# Altium PCB AQCA-Light-Control-A0.PcbDoc (part 1 of 2)
Units mm, origin at the board's own origin, x right, y up, seen from the top; angles counter-clockwise.
Board outline 100 x 100 mm, 2 copper layers (Top Layer, Bottom Layer); 147 components, 99 nets, 439 pads, 162 vias.
Unrouted connection lines stored in the file: 13.
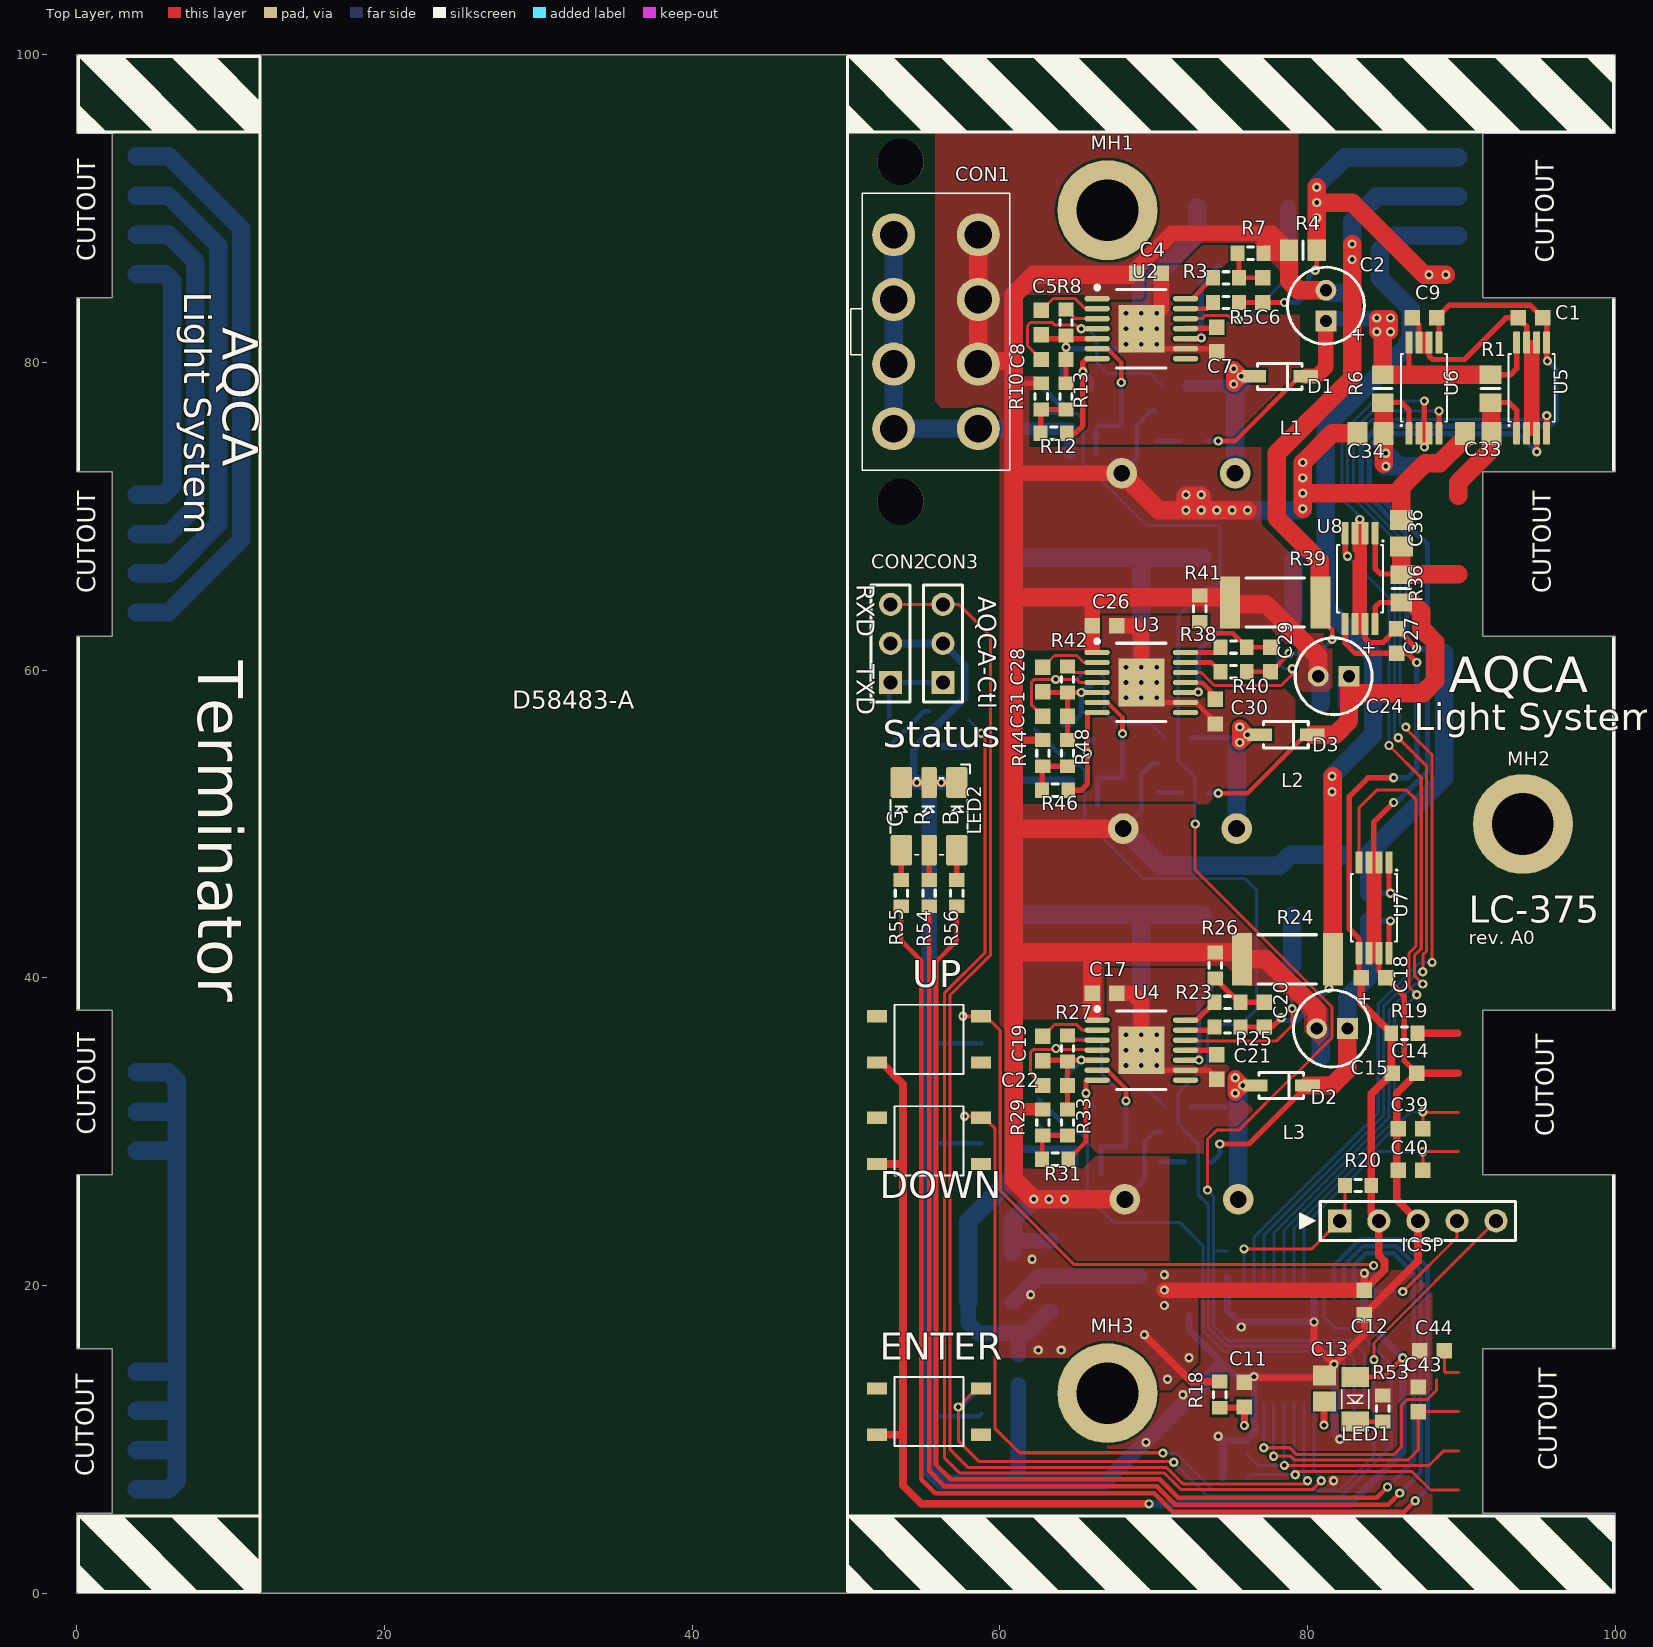
[diagram p0: Top Layer view]
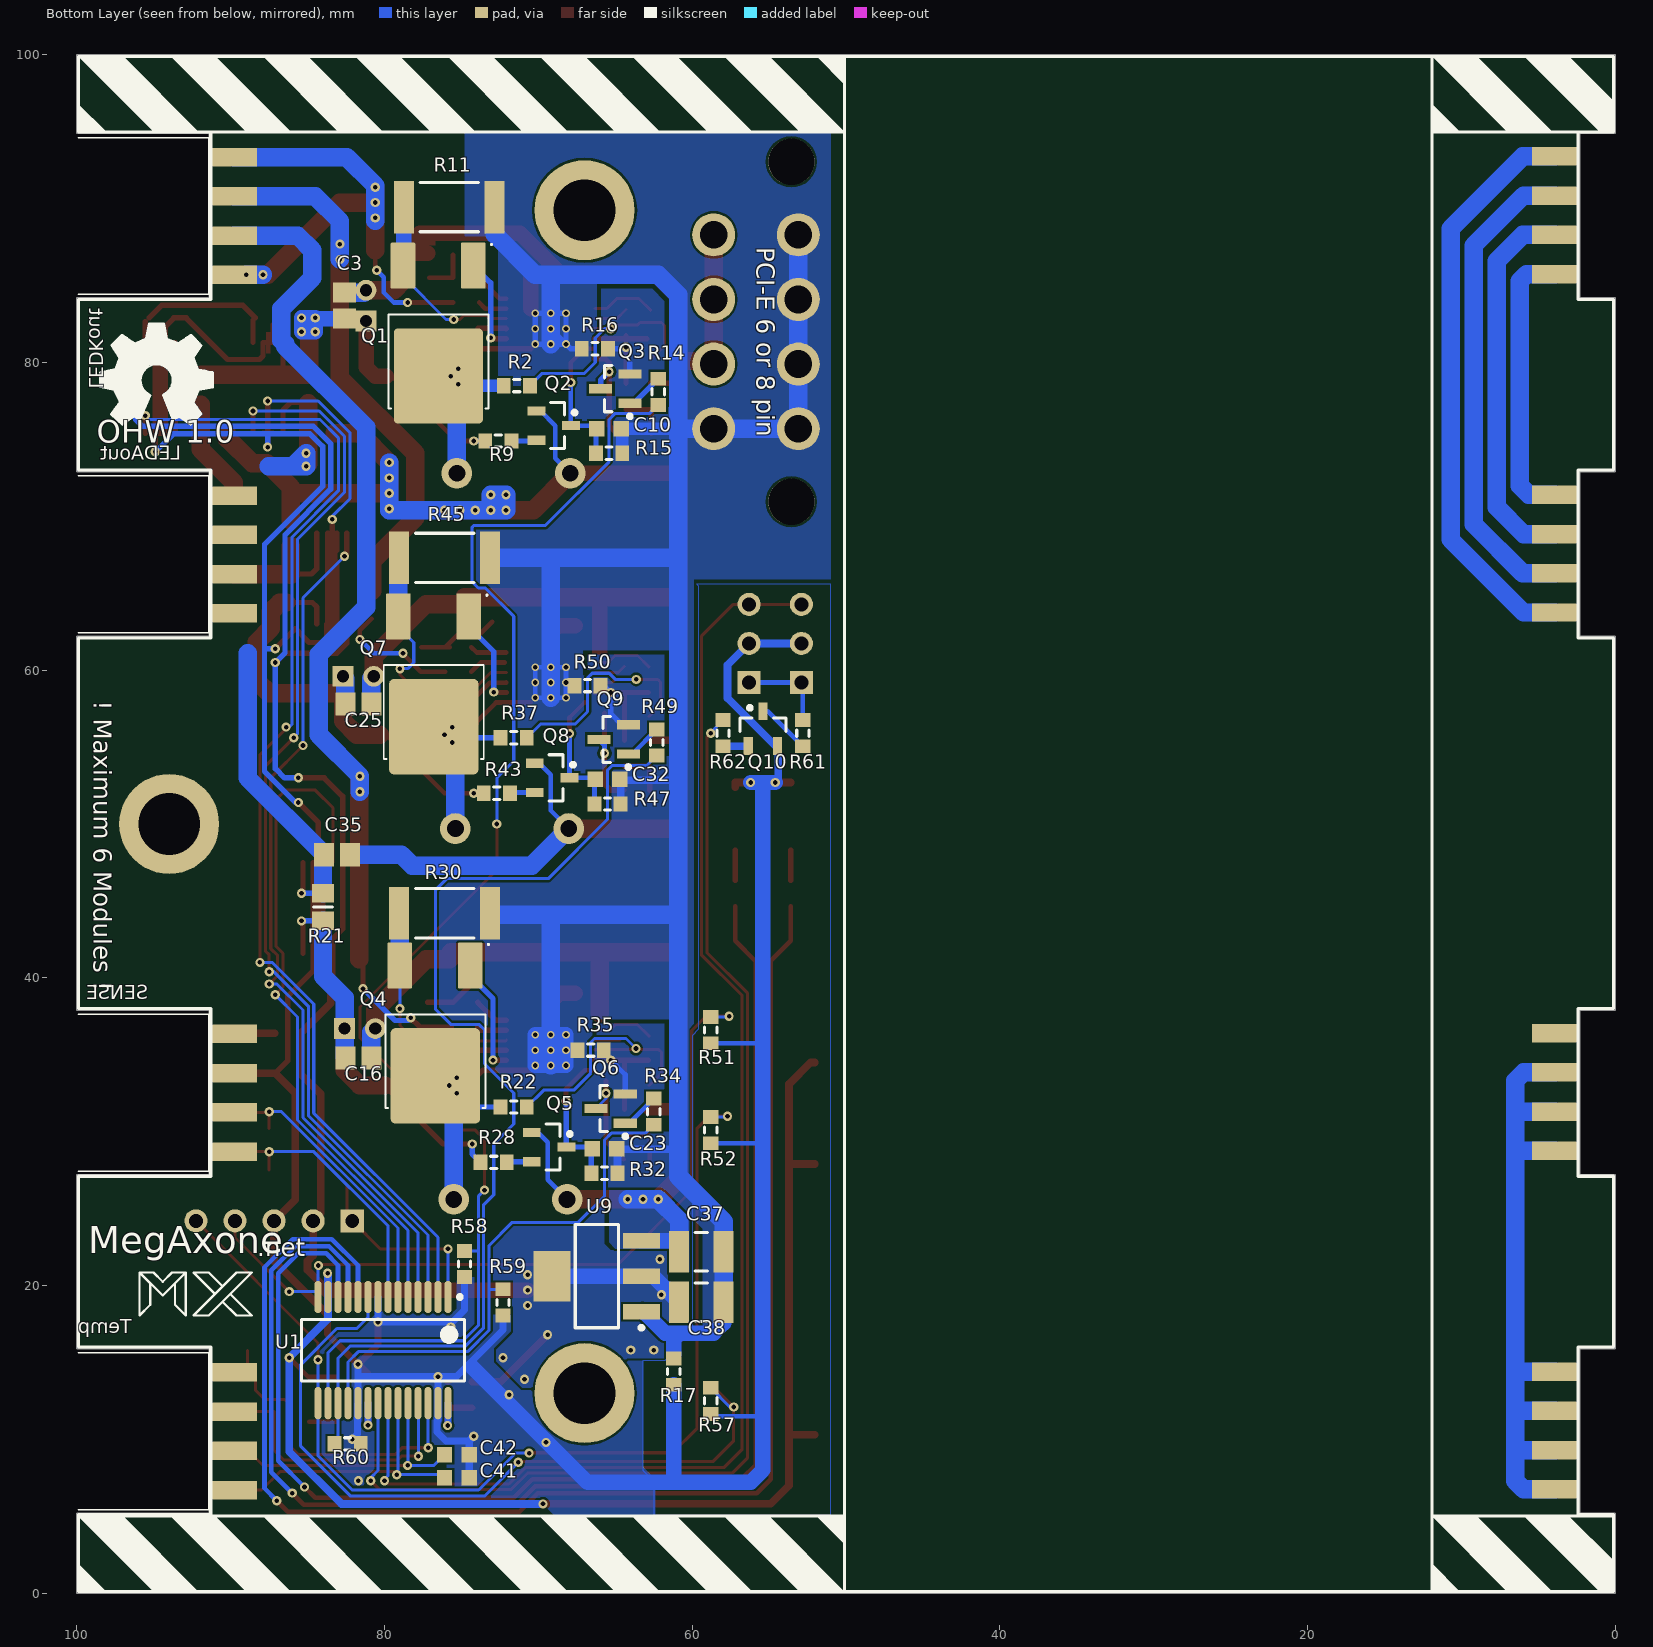
[diagram p1: Bottom Layer view, seen from below]

## Layer stack, top to bottom
Top Layer: signal copper 0.0356
Dielectric: dielectric 0.32, FR-4, Dk 4.8
Bottom Layer: signal copper 0.0356

## Board outline
100,100 100,94.9 91.4,94.9 91.4,84.2 100,84.2 100,72.9 91.4,72.9 91.4,62.2 100,62.2 100,37.9 91.4,37.9 91.4,27.2 100,27.2 100,15.9 91.4,15.9 91.4,5.2 100,5.2 100,0 0,0 0,5.2 2.3,5.2 2.3,15.9 0,15.9 0,27.2 2.3,27.2 2.3,37.9 0,37.9 0,62.2 2.3,62.2 2.3,72.9 0,72.9 0,84.2 2.3,84.2 2.3,94.9 0,94.9 0,100

## Design rules (kind name [scope] priority, off if disabled: settings)
Clearance HV [(InNet('NetC6_2') OR InNet('NetC29_2') OR InNet('NetC20_2') OR InNet('NetC33_2') OR InNet('NetC35_1') OR InNet('NetC36_1') OR InNet('NetC34_1'))] p1: gap=0.2
Clearance [All] p2: gap=0.152
HoleSize [All] p1: absolutevalues=TRUE maxlimit=6.3 minlimit=0.3 maxpercent=80.000 minpercent=20.000
HoleToHoleClearance [All] p1: gap=0.1 allowstackedmicrovias=TRUE
MinimumSolderMaskSliver [All] p1: minsoldermaskwidth=0.1
PlaneClearance [All] p1: clearance=0.5
PlaneConnect [All] p1: planeconnectstyle=Direct reliefexpansion=0.508 reliefentries=4 reliefconductorwidth=0.254 reliefairgap=0.254
PolygonConnect [All] p1: connectstyle=Direct reliefconductorwidth=0.254 reliefentries=4 polygonreliefangle="90 Angle"
RoutingVias [All] p1: holewidth=0.3 width=0.6 viastyle="Through Hole" minholewidth=0.3 minwidth=0.6 maxholewidth=6.3 maxwidth=6.5
SilkToSilkClearance [All] p1: silktosilkclearance=0.1
SilkscreenOverComponentPads [All] p1: minsilkscreentomaskgap=0.254
SolderMaskExpansion [All] p1: expansion=0.05
Width [All] p1: maxlimit=12.7 minlimit=0.152 preferedwidth=0.152
21 further rules are at their usual default settings.

## Classes and differential pairs
component class AQCA-Light-Control-WarmWhite-A0: C24 C25 C26 C27 C28 C29 C30 C31 C32 C36 D3 L2 Q7 Q8 Q9 R36 R37 R38 R39 R40 R41 R42 R43 R44 R45 R46 R47 R48 R49 R50 R60 U3 U8
component class AQCA-Light-Control-uC-A0: C11 C12 C13 C14 C37 C38 C39 C40 C41 C42 C43 C44 CON1 CON2 CON3 DOWN ENTER ICSP LED1 LED2 LEDAout LEDKout MH1 MH2 MH3 Q10 R17 R18 R19 R20 R51 R52 R53 R54 R55 R56 R57 R61 R62 SENSE Temp U1 U9 UP
component class AQCA-Light-Control-Blue-A0: C15 C16 C17 C18 C19 C20 C21 C22 C23 C35 D2 L3 Q4 Q5 Q6 R21 R22 R23 R24 R25 R26 R27 R28 R29 R30 R31 R32 R33 R34 R35 R59 U4 U7
component class AQCA-Light-Control-CoolWhite-A0: C1 C2 C3 C4 C5 C6 C7 C8 C9 C10 C33 C34 D1 L1 Q1 Q2 Q3 R1 R2 R3 R4 R5 R6 R7 R8 R9 R10 R11 R12 R13 R14 R15 R16 R58 U1 U5 U6

## Components (designator, comment, footprint, x,y, rotation, side; value= is the part's Value field where it differs from the comment)
C1 "100nF" CAPC1608N 94.5,82.9 r180 top
C2 "4.7µF" CAPPR2-5x11 81.2,83.7 r90 top
C3 "100nF" CAPC2012N 82.6,83.7 r90 bottom
C4 "1µF" CAPC1608N 69.7,85.8 r180 top
C5 "220nF" CAPC1608N 62.7,82.6 r90 top
C6 "100nF" CAPC1608N 77.1,84.7 r270 top
C7 "3.3µF" CAPC1608N 74.1,81.5 r90 top
C8 "1nF" CAPC1608N 63.5,80.2 r180 top
C9 "100nF" CAPC1608N 87.6,82.9 r180 top
C10 "47pF" CAPC1608N 65.4,75.7 r0 bottom
C11 "100nF" CAPC1608N 75.9,12.9 r90 top
C12 "100nF" CAPC1608N 83.7,18.9 r270 top
C13 "10µF" CAPC2012N 81.1,13.3 r90 top
C14 "100nF" CAPC1608N 86.3,33.8 r180 top
C15 "4.7µF" CAPPR2-5x11 81.6,36.7 r180 top
C16 "100nF" CAPC2012N 81.7,34.8 r180 bottom
C17 "1µF" CAPC1608N 66.8,39 r180 top
C18 "100nF" CAPC1608N 84.3,40 r0 top
C19 "220nF" CAPC1608N 62.8,35.4 r90 top
C20 "100nF" CAPC1608N 77.2,37.6 r270 top
C21 "3.3µF" CAPC1608N 74.1,34.2 r90 top
C22 "1nF" CAPC1608N 63.6,33 r180 top
C23 "47pF" CAPC1608N 65.7,28.9 r0 bottom
C24 "4.7µF" CAPPR2-5x11 81.7,59.6 r180 top
C25 "100nF" CAPC2012N 81.7,57.8 r180 bottom
C26 "1µF" CAPC1608N 66.8,62.9 r180 top
C27 "100nF" CAPC1608N 85.8,61.9 r90 top
C28 "220nF" CAPC1608N 62.8,59.4 r90 top
C29 "100nF" CAPC1608N 77.6,60.7 r270 top
C30 "3.3µF" CAPC1608N 74,57.3 r90 top
C31 "1nF" CAPC1608N 63.6,57 r180 top
C32 "47pF" CAPC1608N 65.5,52.9 r0 bottom
C33 "100nF" CAPC2012N 91.1,75.4 r0 top
C34 "100nF" CAPC2012N 84.1,75.4 r180 top
C35 "100nF" CAPC2012N 83.1,48 r180 bottom
C36 "100nF" CAPC2012N 86.1,68.9 r90 top
C37 "10µF" CAPC3225N 59.4,22.2 r0 bottom
C38 "10µF" CAPC3225N 59.4,18.9 r0 bottom
C39 "100nF" CAPC1608N 86.7,30.2 r180 top
C40 "100nF" CAPC1608N 86.7,27.5 r180 top
C41 "100nF" CAPC1608N 75.3,7.5 r180 bottom
C42 "100nF" CAPC1608N 75.3,9 r180 bottom
C43 "100nF" CAPC1608N 87.2,12.6 r90 top
C44 "100nF" CAPC1608N 88.1,15.761 r180 top
CON1 "Molex Mini-Fit 8pin" "Molex Mini-Fit 8pin" 58.6,88.3 r90 top
CON2 "Header 3" HDR1X3 52.9,59.2 r90 top
CON3 "Header 3" HDR1X3 56.3,59.2 r90 top
D1 "PMEG6020ER" SOD123 78.2,79.1 r0 top
D2 "PMEG6020ER" SOD123 78.3,33 r0 top
D3 "PMEG6020ER" SOD123 78.6,55.8 r0 top
DOWN "Tact Button NO" "TACT SMD 4.5×4.5mm" 51.9,30.9 r0 top
ENTER "Tact Button NO" "TACT SMD 4.5×4.5mm" 51.9,13.3 r0 top
ICSP "Header 5" HDR1X5 82.1,24.2 r0 top
L1 "33µH" "Inductor AIUR5-6" 71.6,72.8 r0 top
L2 "33µH" "Inductor AIUR5-6" 71.7,49.7 r0 top
L3 "33µH" "Inductor AIUR5-6" 71.8,25.6 r0 top
LED1 "" "LED 3216m" 83.1,12.6 r270 top
LED2 "LED RGB" "LED PLCC-6" 55.4,50.5 r0 top
LEDAout "HDR4x1" "HDR4x1 EDGE female" 89.8,63.7 r0 bottom
LEDKout "HDR4x1" "HDR4x1 EDGE female" 89.8,85.7 r0 bottom
MH1 "Mounting Hole" "Mount Hole 4-6.5" 67,89.9 r0 top
MH2 "Mounting Hole" "Mount Hole 4-6.5" 94,50 r0 top
MH3 "Mounting Hole" "Mount Hole 4-6.5" 67,13 r0 top
Q1 "NTD5867NL" "DPAK 369AA" 78.8,86.3 r90 bottom
Q2 "S8550" SOT23_N 69,75.9 r180 bottom
Q3 "2N7002" SOT23-3N 65,78.3 r0 bottom
Q4 "NTD5867NL" "DPAK 369AA" 79,40.8 r90 bottom
Q5 "S8550" SOT23_N 69.3,29 r180 bottom
Q6 "2N7002" SOT23-3N 65.3,31.5 r0 bottom
Q7 "NTD5867NL" "DPAK 369AA" 79.1,63.5 r90 bottom
Q8 "S8550" SOT23_N 69.1,53 r180 bottom
Q9 "2N7002" SOT23-3N 65.1,55.5 r0 bottom
Q10 "S8050" SOT23_N 55.4,56.2 r90 bottom
R1 "0.1" RESC2012N 91.9,78.3 r90 top
R2 "27K" RESC1608N 71.4,78.5 r0 bottom
R3 "1K" RESC1608N 74.7,85.5 r180 top
R4 "0.1" RESC2012N 79.7,87.3 r0 top
R5 "1K" RESC1608N 74.7,83.9 r0 top
R6 "0.1" RESC2012N 84.9,78.3 r90 top
R7 "10" RESC1608N 76.3,87.1 r0 top
R8 "12.4K" RESC1608N 64.3,82.6 r270 top
R9 "470K" RESC1608N 72.6,74.9 r0 bottom
R10 "10K" RESC1608N 62.7,77.8 r90 top
R11 "0.1" RESC6332N 75.8,90.1 r0 bottom
R12 "27K" RESC1608N 63.5,75.4 r180 top
R13 "1.5K" RESC1608N 64.3,77.8 r270 top
R14 "10K" RESC1608N 62.2,78.1 r270 bottom
R15 "12.4K" RESC1608N 65.4,74.1 r0 bottom
R16 "0" RESC1608N 66.325,80.9 r0 bottom
R17 "0" RESC1608N 61.2,14.4 r90 bottom
R18 "10" RESC1608N 74.3,12.9 r90 top
R19 "0" RESC1608N 86.3,36.4 r0 top
R20 "10K" RESC1608N 83.3,26.5 r0 top
R21 "0.1" RESC2012N 84,44.6 r270 bottom
R22 "27K" RESC1608N 71.6,31.6 r0 bottom
R23 "1K" RESC1608N 74.8,38.4 r180 top
R24 "0.2" RESC6332N 78.7,41.2 r0 top
R25 "1K" RESC1608N 74.8,36.8 r0 top
R26 "10" RESC1608N 74,40.8 r90 top
R27 "12.4K" RESC1608N 64.4,35.4 r270 top
R28 "470K" RESC1608N 72.9,28 r0 bottom
R29 "10K" RESC1608N 62.8,30.6 r90 top
R30 "0.1" RESC6332N 76.1,44.2 r0 bottom
R31 "27K" RESC1608N 63.6,28.2 r180 top
R32 "12.4K" RESC1608N 65.7,27.3 r0 bottom
R33 "1.5K" RESC1608N 64.4,30.6 r270 top
R34 "10K" RESC1608N 62.5,31.3 r270 bottom
R35 "0" RESC1608N 66.6,35.3 r0 bottom
R36 "0.1" RESC2012N 86.1,65.3 r270 top
R37 "27K" RESC1608N 71.6,55.6 r0 bottom
R38 "1K" RESC1608N 75.2,61.5 r180 top
R39 "0.2" RESC6332N 77.9,64.4 r0 top
R40 "1K" RESC1608N 75.2,59.9 r0 top
R41 "10" RESC1608N 73,64 r90 top
R42 "12.4K" RESC1608N 64.4,59.4 r270 top
R43 "470K" RESC1608N 72.7,52 r0 bottom
R44 "10K" RESC1608N 62.8,54.6 r90 top
R45 "0.1" RESC6332N 76.1,67.3 r0 bottom
R46 "27K" RESC1608N 63.6,52.2 r180 top
R47 "12.4K" RESC1608N 65.5,51.3 r0 bottom
R48 "1.5K" RESC1608N 64.4,54.6 r270 top
R49 "10K" RESC1608N 62.3,55.3 r270 bottom
R50 "0" RESC1608N 66.8,59 r0 bottom
R51 "10K" RESC1608N 58.8,36.6 r90 bottom
R52 "10K" RESC1608N 58.8,30.1 r90 bottom
R53 "470" RESC1608N 84.9,12 r270 top
R54 "470" RESC1608N 55.4,45.5 r90 top
R55 "330" RESC1608N 53.6,45.5 r90 top
R56 "330" RESC1608N 57.2,45.5 r90 top
R57 "10K" RESC1608N 58.8,12.5 r90 bottom
R58 "10K" RESC1608N 74.8,21.4 r270 bottom
R59 "10K" RESC1608N 72.3,18.9 r270 bottom
R60 "10K" RESC1608N 82.4,9.7 r180 bottom
R61 "1K" RESC1608N 52.8,55.9 r90 bottom
R62 "10K" RESC1608N 58,55.9 r270 bottom
SENSE "HDR4x1" "HDR4x1 EDGE female" 89.8,28.7 r0 bottom
Temp "HDR4x1" "HDR4x1 EDGE female" 89.8,6.7 r0 bottom
U1 "PIC32MX150F128B" SSOP28_N 80.1,15.8 r270 bottom
U2 "LM3429" TSOP65P640_HS-14N 69.2,82.2 r0 top
U3 "LM3429" TSOP65P640_HS-14N 69.2,59.2 r0 top
U4 "LM3429" TSOP65P640_HS-14N 69.2,35.3 r0 top
U5 "TCS103" TSSOP8N_N 93.6,75.4 r0 top
U6 "TCS103" TSSOP8N_N 86.6,75.4 r0 top
U7 "TCS103" TSSOP8N_N 85.3,47.5 r180 top
U8 "TCS103" TSSOP8N_N 84.4,68.9 r180 top
U9 "NCP117LP-??" SOT223-4N 66.2,20.6 r0 bottom
UP "Tact Button NO" "TACT SMD 4.5×4.5mm" 51.9,37.5 r0 top

## Footprints (in the part's own frame and the unit in brackets; to place one, negate y for a bottom-side part, rotate by r counter-clockwise, add the part's x,y. Pads: shape width x height; smd on the part's side, far side on the other; paste and mask are expansions set on the pad)
CAPC1608N [mm] "Chip Capacitor, Body 1.6x0.8mm, IPC Medium Density"
  rect 1x1 smd: 1(-0.8,0) 2(0.8,0)
  body extent -0.87,-0.48 0.87,0.48, height 0.85
CAPC2012N [mm] "Chip Capacitor, Body 2.0x1.3mm, IPC Medium Density"
  rect 1.3x1.5 smd: 1(-0.85,0) 2(0.85,0)
  body extent -1.1,-0.72 1.1,0.72, height 1.1
CAPC3225N [mm] "Chip Capacitor, Body 3.2x2.5mm, IPC Medium Density"
  rect 1.3x2.7 smd: 1(-1.45,0) 2(1.45,0)
  silkscreen extent -0.4,-1.25 0.4,1.25, body extent -1.7,-1.35 1.7,1.35, height 1.35
CAPPR2-5x11 [mm] "Capacitor, Electrolytic, Radial; Body 5 x 11 mm (Dia.xH typ); Pin Spacing 2 mm (typ)"
  rect 1.35x1.35 hole 0.8: 1(-1,0)
  round 1.35 hole 0.8: 2(1,0)
  silkscreen extent -2.5,-2.5 2.5,2.5
"DPAK 369AA" [mm] "DPAK 369 SMD 6x6.5mm"
  rrect10% 3x1.6 smd: 1(0,-4.575) 3(0,0)
  rrect10% 6.2x5.8 smd: 4(-7.175,-2.3)
  silkscreen extent -9.28,-5.77 1.4,0.95, body extent -9.28,-5.55 -3.17,0.95, height 2.25
HDR1X3 [mm] "Connector; Header; 3 Position"
  rect 1.5x1.5 hole 0.9: 1(0,0)
  round 1.5 hole 0.9: 2(2.54,0) 3(5.08,0)
  silkscreen extent -1.27,-1.27 6.35,1.27
HDR1X5 [mm] "Connector; Header; 5 Position"
  rect 1.5x1.5 hole 0.9: 1(0,0)
  round 1.5 hole 0.9: 2(2.54,0) 3(5.08,0) 4(7.62,0) 5(10.16,0)
  silkscreen extent -1.27,-1.27 11.43,1.27
"HDR4x1 EDGE female" [mm] "Header mounted on the edge as a SMD part"
  rect 3x1.2 smd: 1(0,-7.65) 2(0,-5.1) 3(0,-2.55) 4(0,0)
  silkscreen extent 1.63,-8.93 10.12,1.28, body extent 1.63,-8.93 10.12,1.28, height 2.5
"Inductor AIUR5-6" [mm] "Abracon AIUR5-6 Inductor family 12.7mm dia"
  round 2 hole 1.1: 1(-3.675,0) 2(3.7,0)
  body extent -6.3,-6.34 6.35,6.34, height 18
"LED 3216m" [mm] "LED 3.2×1.6mm"
  rect 1.3x1.8 smd: A(-1.45,0) K(1.45,0)
  silkscreen extent -0.63,-0.87 0.63,0.87, body extent -1.6,-0.8 1.6,0.8, height 1
"LED PLCC-6" [mm] "LED SMD PLCC-6 5×5mm body 6pin"
  rrect20% 1.4x2 smd: 1(-1.8,2.2) 2(-1.8,-2.2) 5(1.8,2.2) 6(1.8,-2.2)
  rrect20% 1x2 smd: 3(0,2.2) 4(0,-2.2)
  silkscreen extent -2.5,-2.5 2.68,3.37, body extent -2.5,-2.5 2.5,2.5, height 1.5
"Molex Mini-Fit 8pin" [mm] "Molex ATX PCI-E Connector"
  round 2.8 hole 1.8: 1(0,0) 2(-4.2,0) 3(-8.4,0) 4(-12.6,0) 5(0,5.5) 6(-4.2,5.5) 7(-8.4,5.5) 8(-12.6,5.5)
  round 3 hole 3 unplated: ""(-17.35,5.05) ""(4.75,5.05)
  silkscreen extent -15.3,-2.05 2.7,8.3, body extent -15.3,-2.05 2.7,8.3, height 12.8
"Mount Hole 4-6.5" [mm] "Mounting Hole 4mm hole 6.5mm ring"
  round 6.5 hole 4: 1(0,0)
RESC1608N [mm] "Chip Resistor, Body 1.6x0.8mm, IPC Medium Density"
  rect 0.9x1 smd: 1(-0.85,0) 2(0.85,0)
  silkscreen extent -0.2,-0.4 0.2,0.4, body extent -0.85,-0.48 0.85,0.48, height 0.6
RESC2012N [mm] "Chip Resistor, Body 2.0x1.3mm, IPC Medium Density"
  rect 1.2x1.4 smd: 1(-0.9,0) 2(0.9,0)
  silkscreen extent 0,-0.6 0,0.6, body extent -1.07,-0.7 1.07,0.7, height 0.65
RESC6332N [mm] "Chip Resistor, Body 6.3x3.2mm, IPC Medium Density"
  rect 1.3x3.4 smd: 1(-2.95,0) 2(2.95,0)
  silkscreen extent -1.9,-1.6 1.9,1.6, body extent -3.22,-1.68 3.22,1.68, height 0.71
SOD123 [mm] "SOD-123; 2 Leads; Body 2.7 x 1.6 mm, (LxW)"
  rect 1.6x0.8 smd: 1(-1.7,0) 2(1.7,0)
  silkscreen extent -1.45,-0.85 1.45,0.85
SOT23-3N [mm] "SOT23, 3-Leads, Body 2.9x1.3mm, Pitch 0.95mm, Lead Span 2.5mm, IPC Medium Density"
  rect 1.5x0.6 smd: 1(-0.95,0.95) 2(-0.95,-0.95) 3(0.95,0)
  silkscreen extent -1.07,-1.5 0.7,1.92, body extent -0.7,-1.5 0.7,1.5, height 1.1
SOT23_N [mm] "SOT23, 3-Leads, Body 2.9x1.3mm, Pitch 0.95mm, Lead Span 2.3mm - Reverse Pinning, IPC Medium Density"
  rect 1.15x0.6 smd: 1(1.125,0) 2(-1.125,-0.95) 3(-1.125,0.95)
  silkscreen extent -0.2,-1.5 1.47,1.5, body extent -0.7,-1.5 0.7,1.5, height 1.1
SOT223-4N [mm] "SOT223, 4-Leads, Body 6.5x3.5mm, Pitch 2.3mm, Lead Span 7mm, IPC Medium Density"
  rect 2.4x1 smd: 1(-2.9,2.3) 2(-2.9,0) 3(-2.9,-2.3)
  rect 2.4x3.3 smd: 4(2.9,0)
  silkscreen extent -3.02,-3.35 1.4,3.47, body extent -1.85,-3.35 1.85,3.35, height 1.8
SSOP28_N [mm] "SOP, 28-Leads, Body 10.2x5.3mm, Pitch 0.65mm, IPC Medium Density"
  oval 2.1x0.45 smd: 1(-3.45,4.225) 2(-3.45,3.575) 3(-3.45,2.925) 4(-3.45,2.275) 5(-3.45,1.625) 6(-3.45,0.975) 7(-3.45,0.325) 8(-3.45,-0.325) 9(-3.45,-0.975) 10(-3.45,-1.625) 11(-3.45,-2.275) 12(-3.45,-2.925) 13(-3.45,-3.575) 14(-3.45,-4.225) 15(3.45,-4.225) 16(3.45,-3.575) 17(3.45,-2.925) 18(3.45,-2.275) 19(3.45,-1.625) 20(3.45,-0.975) 21(3.45,-0.325) 22(3.45,0.325) 23(3.45,0.975) 24(3.45,1.625) 25(3.45,2.275) 26(3.45,2.925) 27(3.45,3.575) 28(3.45,4.225)
  silkscreen extent -3.57,-5.3 2,5.3, body extent -2.7,-5.3 2.7,5.3, height 1.99
"TACT SMD 4.5×4.5mm" [mm] "Tact push-button SMD 4.5×4.5mm body"
  rect 1.3x0.8 smd: 1(0.125,-3) 2(6.875,-3) 3(0.125,0) 4(6.875,0)
  silkscreen extent 1.25,-3.75 5.75,0.75, body extent 1.25,-3.75 5.75,0.75, height 3.8
TSOP65P640_HS-14N [mm] "TSOP, 14-Leads, Body 5x4.4mm, Pitch 0.65mm, Exposed Pad, IPC Medium Density"
  oval 1.65x0.35 smd: 1(-2.875,1.95) 2(-2.875,1.3) 3(-2.875,0.65) 4(-2.875,0) 5(-2.875,-0.65) 6(-2.875,-1.3) 7(-2.875,-1.95) 8(2.875,-1.95) 9(2.875,-1.3) 10(2.875,-0.65) 11(2.875,0) 12(2.875,0.65) 13(2.875,1.3) 14(2.875,1.95)
  rect 3x3.1 smd: 15(0,0)
  silkscreen extent -3,-2.55 1.6,2.8, body extent -2.25,-2.55 2.25,2.55, height 1.1
TSSOP8N_N [mm] "TSSOP 8pin Nominal Density Nominal 4.4×3mm"
  rrect20% 0.45x1.45 smd: 1(0,0) 2(0.65,0) 3(1.3,0) 4(1.95,0) 5(1.95,5.9) 6(1.3,5.9) 7(0.65,5.9) 8(0,5.9)
  silkscreen extent -0.53,0.48 2.47,5.15, body extent -0.53,0.75 2.47,5.15, height 1.2

## Part data
C1 C3 C4 C5 C6 C7 C8 C9 C10 C11 C12 C13 C14 C16 C17 C18 C19 C20 C21 C22 C23 C25 C26 C27 C28 C29 C30 C31 C32 C33 C34 C35 C36 C37 C38 C39 C40 C41 C42 C43 C44: library part Capacitor
C2 C15 C24: library part "Capacitor Polarised"
CON2 CON3: "Header, 3-Pin"
D1 D2 D3: library part "Schottky Diode"
ICSP: "Header, 5-Pin"
L1 L2 L3: library part Inductor
LED1: library part LED
Q1 Q3 Q4 Q6 Q7 Q9: library part "MOSFET N-Ch"
Q2 Q5 Q8: library part PNP
Q10: library part NPN
R1 R2 R3 R4 R5 R6 R7 R8 R9 R10 R11 R12 R13 R14 R15 R16 R17 R18 R19 R20 R21 R22 R23 R24 R25 R26 R27 R28 R29 R30 R31 R32 R33 R34 R35 R36 R37 R38 R39 R40 R41 R42 R43 R44 R45 R46 R47 R48 R49 R50 R51 R52 R53 R54 R55 R56 R57 R58 R59 R60 R61 R62: library part Resistor
U1: library part PIC32MX120FxxxB
U9: library part NCP1117LP

## Free pads (board coordinates)
  rect 3x1.2 smd far side: 1(3.9,6.75) 1(3.9,28.75) 1(3.9,63.75) 1(3.9,85.75) 2(3.9,9.3) 2(3.9,31.3) 2(3.9,66.3) 2(3.9,88.3) 3(3.9,11.85) 3(3.9,33.85) 3(3.9,68.85) 3(3.9,90.85) 4(3.9,14.4) 4(3.9,36.4) 4(3.9,71.4) 4(3.9,93.4)

## Via types
v1: diameter 0.6, hole 0.3, Top Layer to Bottom Layer, tented both sides, 132 vias
v2: diameter 0.5, hole 0.3, Top Layer to Bottom Layer, tented both sides, 27 vias
v3: diameter 0.6, hole 0.3, Top Layer to Bottom Layer, 3 vias

## Nets (pads, with @x,y where several pads share a name; then routed paths per layer and width w, separated by ;. In a path a pad name is that pad's centre, name@x,y a point inside that pad or via, vN(x,y) a via of type N, cw(c..) or ccw(c..) an arc to the next point about the centre after c; other vN are vias at no path point)
AGND1: C5.1 C8.1 Q3.2 R8.2 R13.1 R16.1 U2.5 | length 8.4
  Top Layer w0.35: C5.1@62.95,81.55 R8.2@64.3,81.55 ; R13.1@64.3,78.65 C8.1@64.3,80.2 64.3,80.875 R8.2@64.3,81.55 ; R8.2@64.3,81.75 R8.2@64.3,81.55 ; U2.5@66.325,81.55 R8.2@64.3,81.55
  Bottom Layer w0.35: Q3.2@64.05,79.25 64.05,79.95 ; v1(64.3,81) 64.4,80.9 R16.1@65.475,80.9
AGND2: C28.1 C31.1 Q9.2 R42.2 R48.1 R50.1 U3.5 | length 10.2
  Top Layer w0.35: C28.1@62.85,58.55 R42.2@64.4,58.55 ; R48.1@64.4,55.45 C31.1@64.4,57 R42.2@64.4,58.55 ; U3.5@66.325,58.55 v1(65.3,58.55) R42.2@64.4,58.55
  Bottom Layer w0.35: Q9.2@64.15,56.45 64.55,56.45 65.3,57.2 v1(65.3,58.55) 65.75,59 R50.1@65.95,59
AGND3: C19.1 C22.1 Q6.2 R27.2 R33.1 R35.1 U4.5 | length 9.2
  Top Layer w0.35: C19.1@62.85,34.65 v1(65.3,34.65) U4.5@66.325,34.65 ; R33.1@64.4,31.45 C22.1@64.4,33 R27.2@64.4,34.55
  Bottom Layer w0.35: Q6.2@64.35,32.45 64.35,33.7 v1(65.3,34.65)
GND: C4.1 C7.1 C10.1 C17.1 C21.1 C23.1 C26.1 C30.1 C32.1 C37.1 C38.1 CON1.4 CON1.5 CON1.6 CON1.7 CON1.8 R11.1 R15.1 R16.2 R17.2 R30.1 R32.1 R35.2 R45.1 R47.1 R50.2 U2.9 U2.15 U3.9 U3.15 U4.9 U4.15 U9.1 | length 227.3
  Top Layer w0.3: U3.15@70.5,57.9 U3.9@72.075,57.9 72.75,57.9 74,56.65 C30.1@74,56.5
  Top Layer w0.35: U4.15@70,34 U4.9@72.075,34 73.6,34 C21.1@74.2,33.4 ; U2.15@70.5,80.9 U2.9@72.075,80.9 C7.1@73.8,80.9
  Top Layer w1: C17.1@67.6,39 68.6,39 69.2,38.4 v2(69.2,36.3) v2(69.2,35.3) v2(69.2,34.3) ; C26.1@67.6,62.9 68.7,62.9 69.2,62.4 v2(69.2,60.2) v2(69.2,59.2) ; v2(69.2,82.2) v2(69.2,83.2) ; U2.15@70.5,83.5 C4.1@70.5,85.8
  Bottom Layer w0.3: v2(68.2,58.2) v2(68.2,59.2) v2(68.2,60.2) v2(69.2,60.2) v2(70.2,60.2) v2(70.2,58.2) v2(69.2,58.2) v2(68.2,58.2)
  Bottom Layer w0.35: R16.2@67.175,80.9 67.9,80.9 v2(68.2,81.2) ; v2(69.2,82.2) v2(68.2,81.2) ; v2(68.2,81.2) v2(68.2,82.2) v2(68.2,83.2) v2(69.2,83.2) v2(70.2,83.2) v2(70.2,82.2) v2(70.2,81.2) v2(69.2,81.2) v2(68.2,81.2)
  Bottom Layer w0.5: 60.95,52.85 64.65,52.85 R47.1@64.65,51.3 ; 61.35,28.85 64.85,28.85 R32.1@64.85,27.3
  Bottom Layer w0.8: 60.9,75.7 C10.1@64.6,75.7 ; R15.1@64.55,74.1 C10.1@64.55,75.65
  Bottom Layer w1: C38.1@57.95,18.9 57.95,17.55 58.602,16.898 61.77,16.898 63.173,18.3 U9.1@63.3,18.3 ; R17.2@61.2,15.5 61.2,16.798 ; v2@70.2,36.2 v2(70.2,35.3) v2(70.2,34.3) v2(69.2,34.3) v2(68.2,34.3) v2(68.2,35.3) v2(68.2,36.3) v2(69.2,36.3) v2(70.2,36.3)
  Bottom Layer w1.2: CON1.5@53.1,88.3 CON1.6@53.1,84.1 CON1.7@53.1,79.9 CON1.8@53.1,75.7 CON1.4@58.6,75.7 60.9,75.7 ; C38.1@57.95,18.9 C37.1@57.95,22.2 57.95,24.15 60.9,27.1 60.9,75.7 ; 60.9,44.1 R30.1@73.15,44.1 ; 60.9,67.3 69.2,67.3 ; v2(69.2,34.3) v2(69.2,35.3) v2(69.2,36.3) 69.2,44 ; v2(69.2,58.2) v2(69.2,59.2) v2(69.2,60.2) 69.2,67.3 ; v2(69.2,81.2) v2(69.2,82.2) v2(69.2,83.2) 69.2,85.7 ; R11.1@72.85,90.1 72.85,88.35 70.2,85.7 69.2,85.7 ; R45.1@73.15,67.3 69.2,67.3 ; 60.9,75.7 60.9,84.4 62.2,85.7 69.2,85.7
  other v2: 70.2,59.2
NetC2_1: C2.1 C3.1 D1.2 R1.2 R6.2 R9.2 U5.8 U6.8 | length 39.3
  Top Layer w0.3: v1(74.2,74.9) 75.3,74.9 79.5,79.1 D1.2@79.9,79.1
  Top Layer w0.35: 86.6,79.7 U6.8@86.6,81.3 ; R1.2@91.9,79.2 93.2,79.2 93.6,79.6 U5.8@93.6,81.3
  Top Layer w1: D1.2@79.9,79.1 80.6,79.1 81.2,79.7 C2.1@81.2,82.7 ; v1(84.5,82) 84.9,82 v1(85.4,82) v1(85.4,82.9) v1(84.5,82.9) v1(84.5,82)
  Top Layer w1.2: 84.9,82.4 84.9,82 R6.2@84.9,79.2 R1.2@91.9,79.2
  Bottom Layer w0.3: R9.2@73.45,74.9 v1(74.2,74.9)
  Bottom Layer w1: C2.1@81.35,82.85 C3.1@82.6,82.85 v1@84.5,82.85 ; v1@85.35,82.85 v1@84.5,82.85 ; v1@84.5,82.85 v1(84.5,82.9) v1(85.4,82.9) v1(85.4,82) v1(84.5,82) v1@84.5,82.85
NetC5_2: C5.2 U2.2 | length 4.2
  Top Layer w0.2: C5.2@62.7,83.4 63.452,84.152 64.905,84.152 65.557,83.5 U2.2@66.325,83.5
NetC6_1: C6.1 R3.1 R7.1 | length 3.1
  Top Layer w0.3: R7.1@75.55,87 R3.1@75.55,85.5 C6.1@77.1,85.5
NetC6_2: C6.2 LEDKout.1 LEDKout.4 R4.2 R5.2 | length 35.5
  Top Layer w0.3: R5.2@75.55,83.9 C6.2@77.1,83.9 v1@78.5,83.9 ; v1(80.5,86) 80.6,86.1 R4.2@80.6,87.3
  Top Layer w1.2: R4.2@80.6,87.3 v1(80.6,90.4) ; v1(80.6,91.4) v1(80.6,90.4) ; v3(89,85.7) 87.6,85.7 82.9,90.4 v1(80.6,90.4)
  Bottom Layer w0.3: v1(78.5,83.9) 79.4,83.9 80.05,84.55 80.05,85.55 v1(80.5,86)
  Bottom Layer w1.2: v1@80.6,89.223 v1(80.6,89.4) v1(80.6,90.4) 80.6,91.5 82.45,93.35 LEDKout.1@89.8,93.35 ; v3(87.9,85.7) v3(89,85.7)
NetC7_2: C7.2 U2.11 | length 1.9
  Top Layer w0.35: U2.11@72.075,82.2 72.102,82.227 C7.2@73.927,82.227
NetC8_2: C8.2 R2.1 U2.4 | length 15.8
  Top Layer w0.2: C8.2@62.7,80.2 61.8,81.1 61.8,82.4 62,82.6 63.4,82.6 63.548,82.452 64.905,82.452 65.157,82.2 U2.4@66.325,82.2 U2.4@67.1,82.2
  Bottom Layer w0.2: v1(65.3,82.2) 65.7,82.2 66.3,81.6 66.3,80 67,79.3 69.75,79.3 R2.1@70.55,78.5
NetC10_2: C10.2 Q2.1 R15.2 U2.6 | length 9
  Top Layer w0.3: U2.6@66.325,80.9 67,80.9 67.9,80 v1(67.9,78.7)
  Bottom Layer w0.3: R15.2@66.25,74.1 C10.2@66.25,75.65 ; C10.2@66.4,75.9 Q2.1@67.875,75.9 ; Q2.1@67.9,75.925 v1(67.9,78.7)
NetC11_1: C11.1 R18.1 U1.28 | length 4.4
  Top Layer w0.45: R18.1@74.3,12.05 C11.1@75.85,12.05 ; v1(75.9,10.9) C11.1@75.9,12.1 C11.1@75.9,12.3
  Bottom Layer w0.45: v1@75.875,10.925 U1.28@75.875,12.35
NetC13_1: C13.1 U1.20 | length 2.9
  Top Layer w0.45: v1(81.075,10.925) C13.1@81.075,12.425
  Bottom Layer w0.45: v1(81.075,10.925) U1.20@81.075,12.35
NetC15_1: C15.1 C16.1 D2.2 R21.2 R28.2 U7.8 | length 27.2
  Top Layer w0.35: v1(74.3,29.2) 76.2,29.2 D2.2@80,33 ; U7.8@85.3,41.6 v1@85.3,43.7
  Top Layer w1.2: D2.2@80,33 81.6,33 82.6,34 C15.1@82.6,36.7
  Bottom Layer w0.35: R28.2@73.75,28 74.3,28.55 v1(74.3,29.2) ; R21.2@84,43.7 v1@85.3,43.7
  Bottom Layer w1.2: C16.1@82.6,34.85 C15.1@82.6,36.7 82.6,38.7 84,40.1 R21.2@84,43.7
  other v1: 85.4,43.7
NetC19_2: C19.2 U4.2 | length 4
  Top Layer w0.2: C19.2@62.8,36.2 63.552,36.952 65.005,36.952 65.357,36.6 U4.2@66.325,36.6
NetC20_1: C20.1 R23.1 R26.1 | length 3.8
  Top Layer w0.35: R26.1@74,39.95 75.55,38.4 R23.1@75.65,38.4 C20.1@77.2,38.4
NetC20_2: C20.2 LEDKout.3 R24.2 R25.2 | length 66.5
  Top Layer w0.35: R25.2@75.65,36.8 C20.2@77.2,36.8 77.7,36.8 v1(78.3,37.4) ; v1(81.4,39.3) R24.2@81.4,40.75
  Top Layer w1.2: R24.2@81.65,41.2 v1@81.65,53.1
  Bottom Layer w0.35: v1(78.3,37.4) 78.475,37.225 79.321,37.225 81.396,39.3 v1(81.4,39.3)
  Bottom Layer w1.2: v1(81.6,52.1) 81.6,53.121 84.275,55.796 84.275,61.022 81.2,64.097 81.2,75.8 86.45,81.05 86.45,81.212 86.7,81.462 86.7,83.5 84.7,85.5 84.7,87.3 85.65,88.25 LEDKout.3@89.8,88.25
  other v1: 81.6,53.1
NetC21_2: C21.2 U4.11 | length 1.8
  Top Layer w0.35: U4.11@72.075,35.3 C21.2@73.9,35.3
NetC22_2: C22.2 R22.1 U4.4 | length 17.3
  Top Layer w0.2: C22.2@62.8,33 62,33.8 62,35.157 62.195,35.352 66.273,35.352 U4.4@66.325,35.3
  Bottom Layer w0.2: v1(63.654,35.406) 64.3,36.052 66.348,36.052 66.6,35.8 66.6,33.8 67.7,32.7 69.65,32.7 R22.1@70.75,31.6
NetC23_2: C23.2 Q5.1 R32.2 U4.6 | length 9.5
  Top Layer w0.3: U4.6@66.325,34 67,34 68.2,32.8 v1(68.2,32)
  Bottom Layer w0.35: R32.2@66.55,27.3 66.55,28.95 66.6,29 Q5.1@68.175,29 68.175,31.975 v1(68.2,32)
NetC24_1: C24.1 C25.1 D3.2 R36.2 R43.2 U8.8 | length 30.4
  Top Layer w0.3: v1(74.2,52) 76.1,52 D3.2@79.9,55.8
  Top Layer w0.35: U8.8@84.4,63 84.4,64.1 84.7,64.4 R36.2@86.1,64.4
  Top Layer w1.2: D3.2@80.3,55.8 81.8,55.8 82.7,56.7 82.7,58.5 ; C24.1@82.7,59.6 82.7,58.5 ; R36.2@86.4,64.4 86.8,64.4 87.4,63.8 87.4,62.727 88.3,61.827 88.3,59.3 87.5,58.5 82.7,58.5
  Bottom Layer w0.3: R43.2@73.55,52 v1(74.2,52)
  Bottom Layer w1.2: C25.1@82.55,57.8 82.55,59.45 C24.1@82.7,59.6
NetC28_2: C28.2 U3.2 | length 4
  Top Layer w0.2: C28.2@62.8,60.2 63.552,60.952 65.005,60.952 65.457,60.5 U3.2@66.325,60.5
NetC29_1: C29.1 R38.1 R41.1 | length 5.6
  Top Layer w0.3: R41.1@73,63.15 73.752,62.398 75.152,62.398 R38.1@76.05,61.5 ; R38.1@75.772,61.5 R38.1@76.05,61.5 ; C29.1@77.6,61.5 R38.1@76.05,61.5
NetC29_2: C29.2 LEDKout.2 R39.2 R40.2 | length 43.8
  Top Layer w0.3: R40.2@76.05,59.9 C29.2@77.6,59.9 ; C29.2@77.636,59.9 v1@78.8,61.064 ; R39.2@80.85,63.35 81.6,62.6 v1(81.6,62)
  Top Layer w1.2: R39.2@80.8,65.15 80.8,67.1 78,69.9 78,74.1 82.9,79 v3(82.9,86.7) v1(82.9,87.7)
  Bottom Layer w0.3: v1(78.8,61.1) 80.7,61.1 v1(81.6,62)
  Bottom Layer w1.2: v3(82.9,86.7) 82.9,89.2 84.5,90.8 LEDKout.2@89.8,90.8
NetC30_2: C30.2 U3.11 | length 2.3
  Top Layer w0.3: U3.11@72.075,59.2 72.1,59.175 73.15,59.175 C30.2@74,58.325
NetC31_2: C31.2 R37.1 U3.4 | length 17.3
  Top Layer w0.2: C31.2@62.8,57 62.048,57.752 62.048,59.205 62.243,59.4 v1(63.64,59.4) 65,59.4 65.2,59.2 U3.4@66.325,59.2
  Bottom Layer w0.2: v1(63.64,59.4) 65,59.4 65.4,59.8 66.5,59.8 66.8,59.5 66.8,57.3 67.6,56.5 69.85,56.5 R37.1@70.75,55.6
NetC32_2: C32.2 Q8.1 R47.2 U3.6 | length 8.6
  Top Layer w0.3: U3.6@67,57.9 67.975,56.925 v1(67.975,55.875)
  Bottom Layer w0.3: R47.2@66.35,51.3 66.35,52.95 66.4,53 Q8.1@67.975,53 v1(67.975,55.875)
NetC33_2: C33.2 LEDAout.1 R1.1 U5.1 | length 10.2
  Top Layer w0.35: R1.1@91.9,77.4 93.1,77.4 93.6,76.9 U5.1@93.6,75.4
  Top Layer w1.2: 89.8,71.35 89.8,72.2 91.95,74.35 C33.2@91.95,75.4 R1.1@91.95,77.25
NetC34_1: C34.1 LEDAout.4 R6.1 U6.1 | length 11.8
  Top Layer w0.35: R6.1@84.9,77.4 86.1,77.4 86.6,76.9 U6.1@86.6,75.4
  Top Layer w1.2: v1@84.95,73.411 C34.1@84.95,75.4 R6.1@84.95,77.35
  Bottom Layer w1.2: 87.539,73.261 85.939,73.261 ; 85.939,73.261 v1(85.1,73.261) v1(85.1,74.1) 85.939,73.261
NetC35_1: C35.1 LEDAout.2 R21.1 U7.1 | length 20.9
  Top Layer w0.35: v1@85.3,45.5 U7.1@85.3,47.5
  Bottom Layer w0.35: R21.1@84,45.5 v1@85.3,45.5
  Bottom Layer w1.2: R21.1@84,45.5 84,48.1 88.9,53 88.9,61.1
  other v1: 85.4,45.5
NetC36_1: C36.1 LEDAout.3 R36.1 U8.1 | length 9.6
  Top Layer w0.35: U8.1@84.4,68.9 84.4,66.6 84.75,66.25 R36.1@86.05,66.25
  Top Layer w1.2: R36.1@86.1,66.2 R36.1@86.1,66.25 ; C36.1@86.1,68.05 R36.1@86.1,66.25 ; 89.8,66.25 R36.1@86.1,66.25
NetC39_1: C39.1 SENSE.3 U1.6 | length 19.4
  Top Layer w0.2: C39.1@87.5,30.2 v1(87.5,31.3) 87.55,31.25 89.8,31.25
  Bottom Layer w0.2: U1.6@79.125,19.25 79.125,23.732 86.693,31.3 v1(87.5,31.3)
NetC40_1: C40.1 SENSE.4 U1.7 | length 17.9
  Top Layer w0.2: C40.1@87.5,27.5 v1(87.5,28.7) 89.8,28.7
  Bottom Layer w0.2: U1.7@79.775,19.25 79.775,23.883 84.592,28.7 v1(87.5,28.7)
NetC41_1: C41.1 Temp.4 U1.23 | length 19
  Top Layer w0.2: v1(79.2,7.7) 79.4,7.9 86.8,7.9 88,6.7 89.8,6.7
  Bottom Layer w0.2: C41.1@76.1,7.5 76.3,7.7 v1(79.2,7.7) 79.125,7.775 U1.23@79.125,12.35
NetC42_1: C42.1 Temp.3 U1.24 | length 18.4
  Top Layer w0.2: v1(78.5,8.3) 87.9,8.3 88.85,9.25 89.8,9.25
  Bottom Layer w0.2: C42.1@76.1,9 76.8,8.3 v1(78.5,8.3) 78.475,8.325 U1.24@78.475,12.35
NetC43_1: C43.1 Temp.2 U1.25 | length 18.3
  Top Layer w0.2: v1(77.8,8.9) 78.9,8.9 79.148,8.652 86.552,8.652 87.2,9.3 C43.1@87.2,11.8 88.9,11.8 89.8,11.8
  Bottom Layer w0.2: v1(77.8,8.9) U1.25@77.8,12.325
NetC44_1: C44.1 Temp.1 U1.26 | length 20.6
  Top Layer w0.2: v1(77.152,9.452) 78.846,9.452 79.294,9.005 85.606,9.005 86.1,9.498 86.1,12.2 86.5,12.6 87.8,12.6 88.4,13.2 88.4,13.9 ; 88.9,14.4 C44.1@88.9,15.761 ; 88.95,14.35 89.8,14.35
  Bottom Layer w0.2: v1(77.152,9.452) 77.175,9.475 U1.26@77.175,12.35
NetCON2_1: CON2.1 CON3.1 R61.2 | length 5.9
  Bottom Layer w0.3: R61.2@52.8,56.75 52.8,59.1 CON2.1@52.9,59.2 CON3.1@56.3,59.2
NetCON2_3: CON2.3 CON3.3 U1.22 | length 90.6
  Top Layer w0.2: CON2.3@52.9,64.28 57.32,64.28 59.4,62.2 59.4,41.5 56.748,38.848 56.748,9.352 57.948,8.152 70.848,8.152 71.9,7.1 79.8,7.1 v1(80,7.3)
  Bottom Layer w0.2: U1.22@79.775,12.35 79.775,7.625 v1@80,7.4
NetD1_A: D1.1 L1.2 Q1.4 R2.2 | length 11.4
  Top Layer w1: v1(75.2,78.6) v1(75.7,79.1) v1(75.2,79.6) v1(75.2,78.6)
  Bottom Layer w0.8: R2.2@72.25,78.5 Q1.4@75.875,78.5
  Bottom Layer w1.2: L1.2@75.3,72.8 Q1.4@75.3,78.2
NetD2_A: D2.1 L3.2 Q4.4 R22.2 | length 11.4
  Top Layer w1: v1(75.3,33.5) v1(75.3,32.5) v1(75.8,33) v1@75.352,33.448
  Bottom Layer w0.3: R22.2@72.45,31.6 Q4.4@74.675,31.6
  Bottom Layer w1.2: L3.2@75.5,25.6 Q4.4@75.5,32.425
NetD3_A: D3.1 L2.2 Q7.4 R37.2 | length 11.3
  Top Layer w1: v1(75.6,55.3) v1(76.1,55.8) v1(75.6,56.3) v1(75.6,55.3)
  Bottom Layer w0.35: R37.2@72.45,55.6 Q7.4@76.075,55.6
  Bottom Layer w1.2: L2.2@75.4,49.7 Q7.4@75.4,54.925